# Altium PCB airu-board.PcbDoc
Units mil, origin at the board's own origin, x right, y up, seen from the top; angles counter-clockwise.
Board outline 3701 x 2363 mil, 4 copper layers (Top, Internal Plane 1, Internal Plane 2, Bottom), stack 64.6 mil thick; 113 components, 76 nets, 401 pads, 0 vias.
Unrouted connection lines stored in the file: 257.
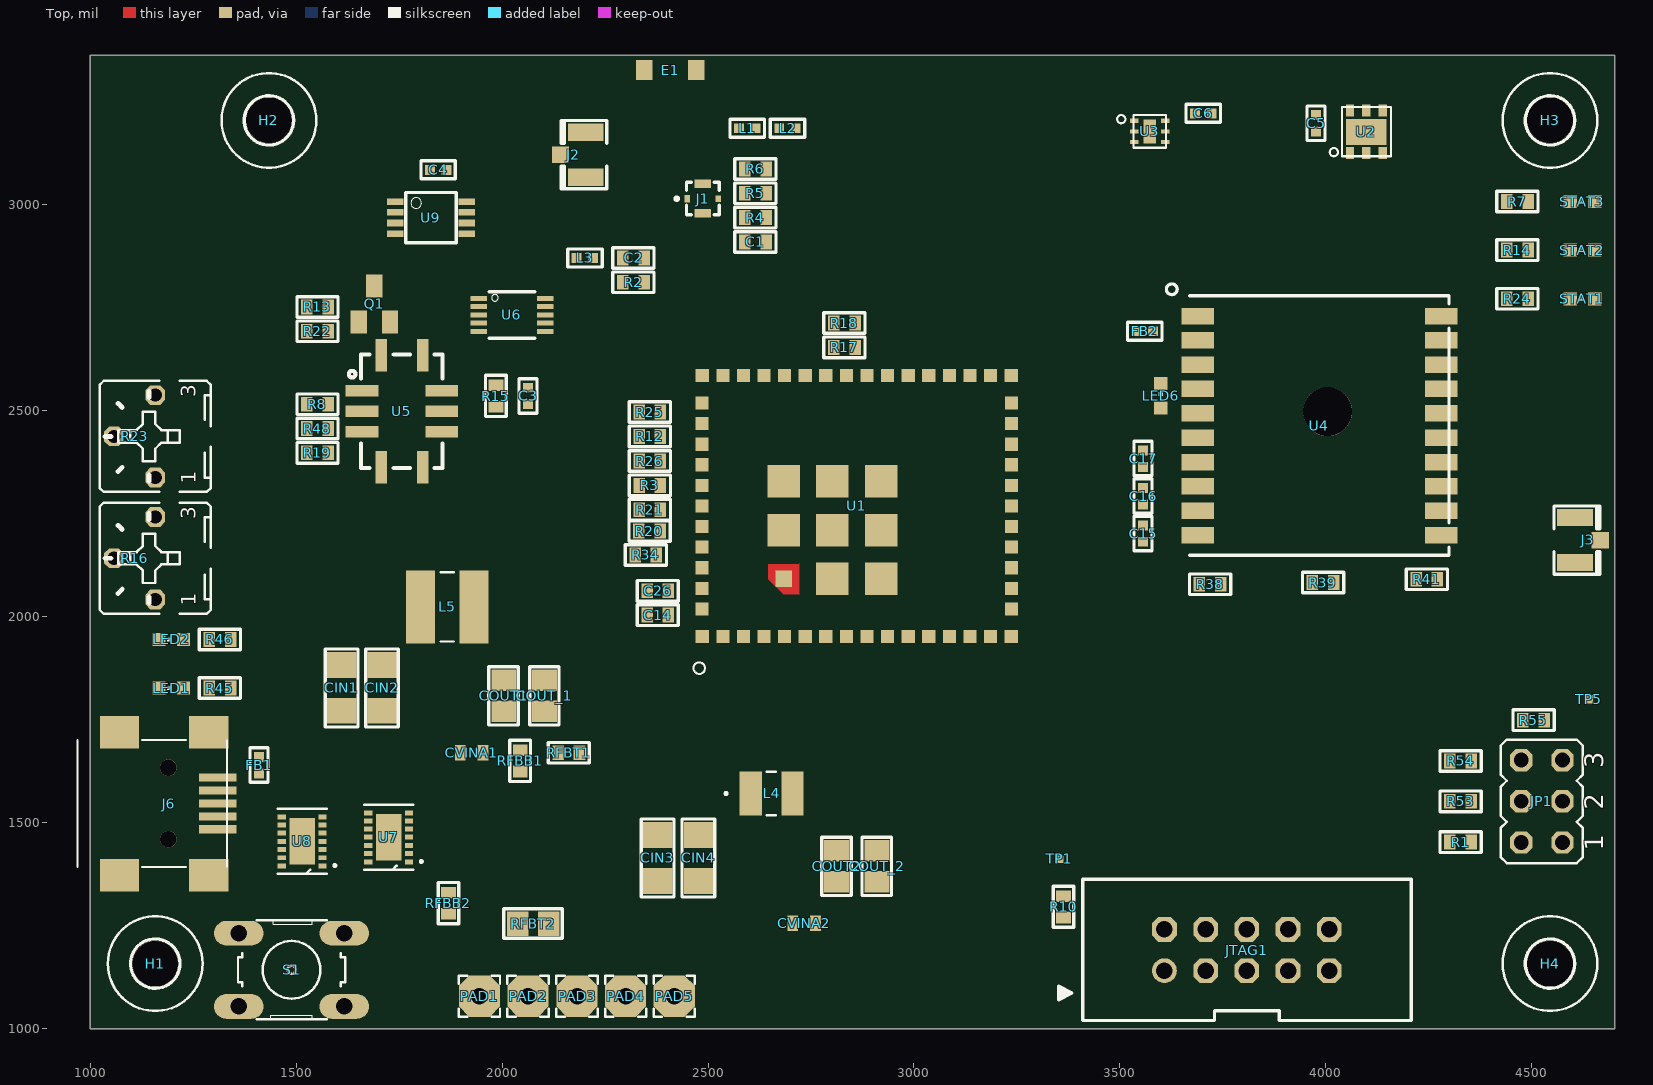
[diagram p0: Top view]
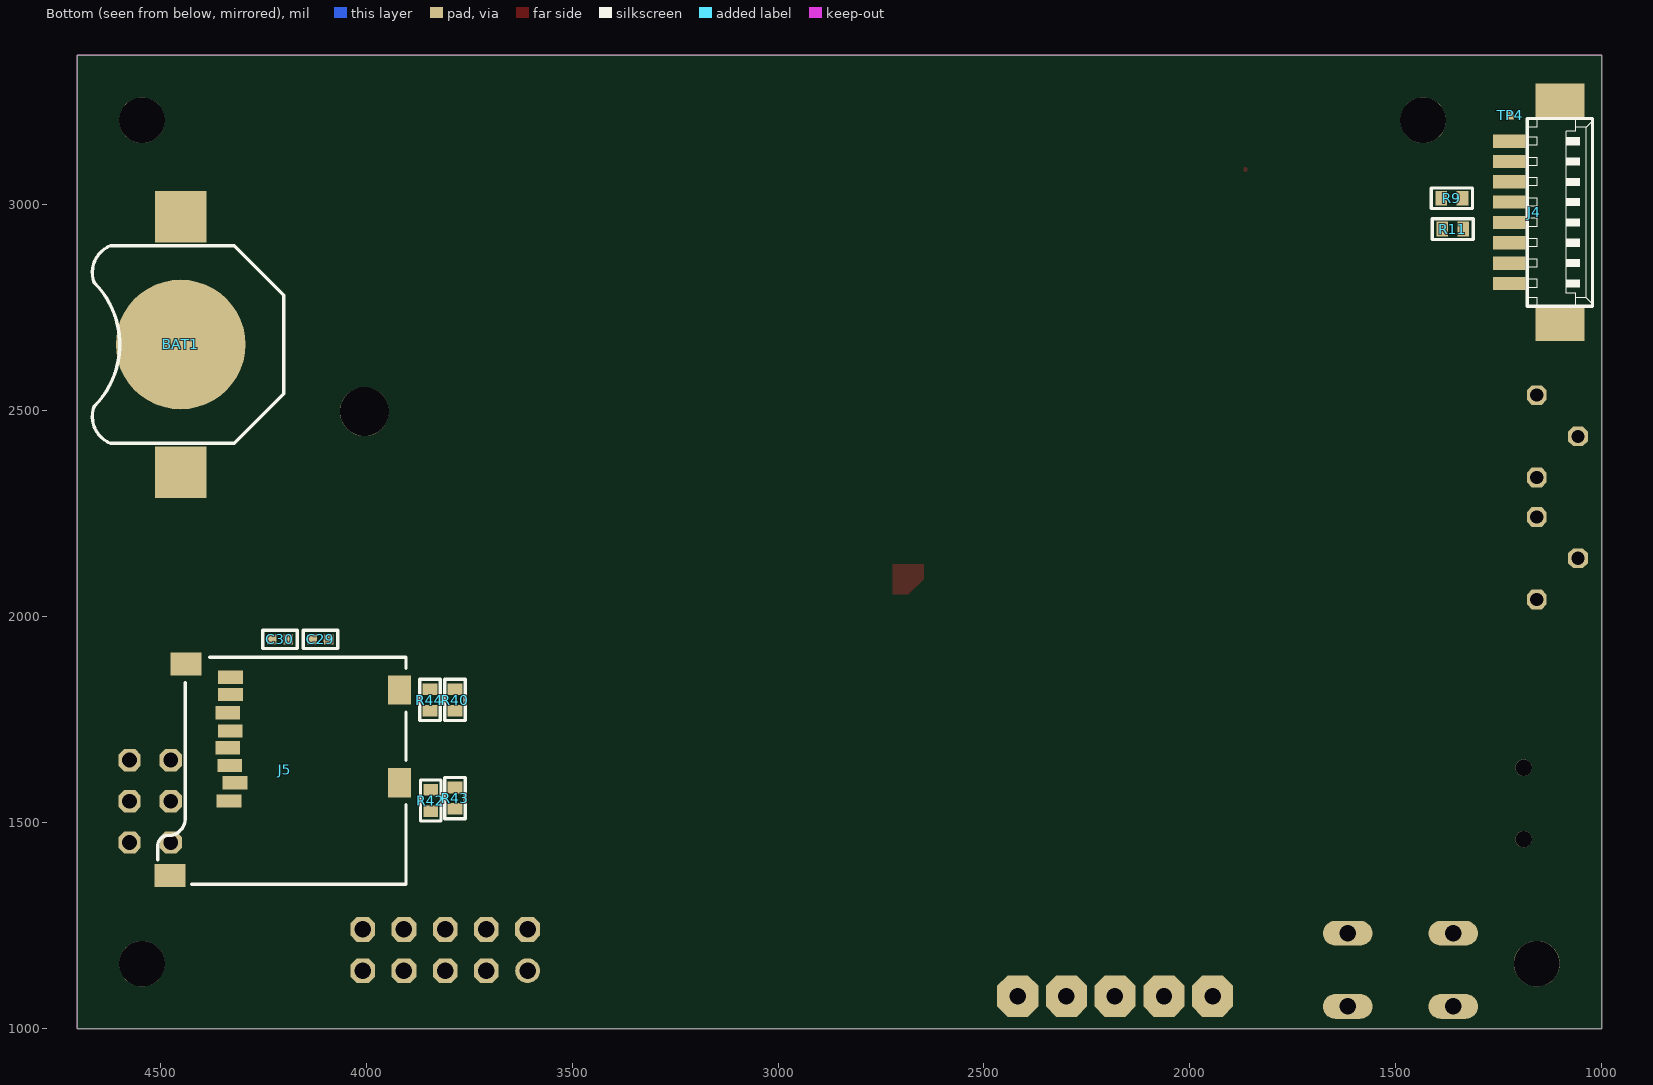
[diagram p1: Bottom view, seen from below]
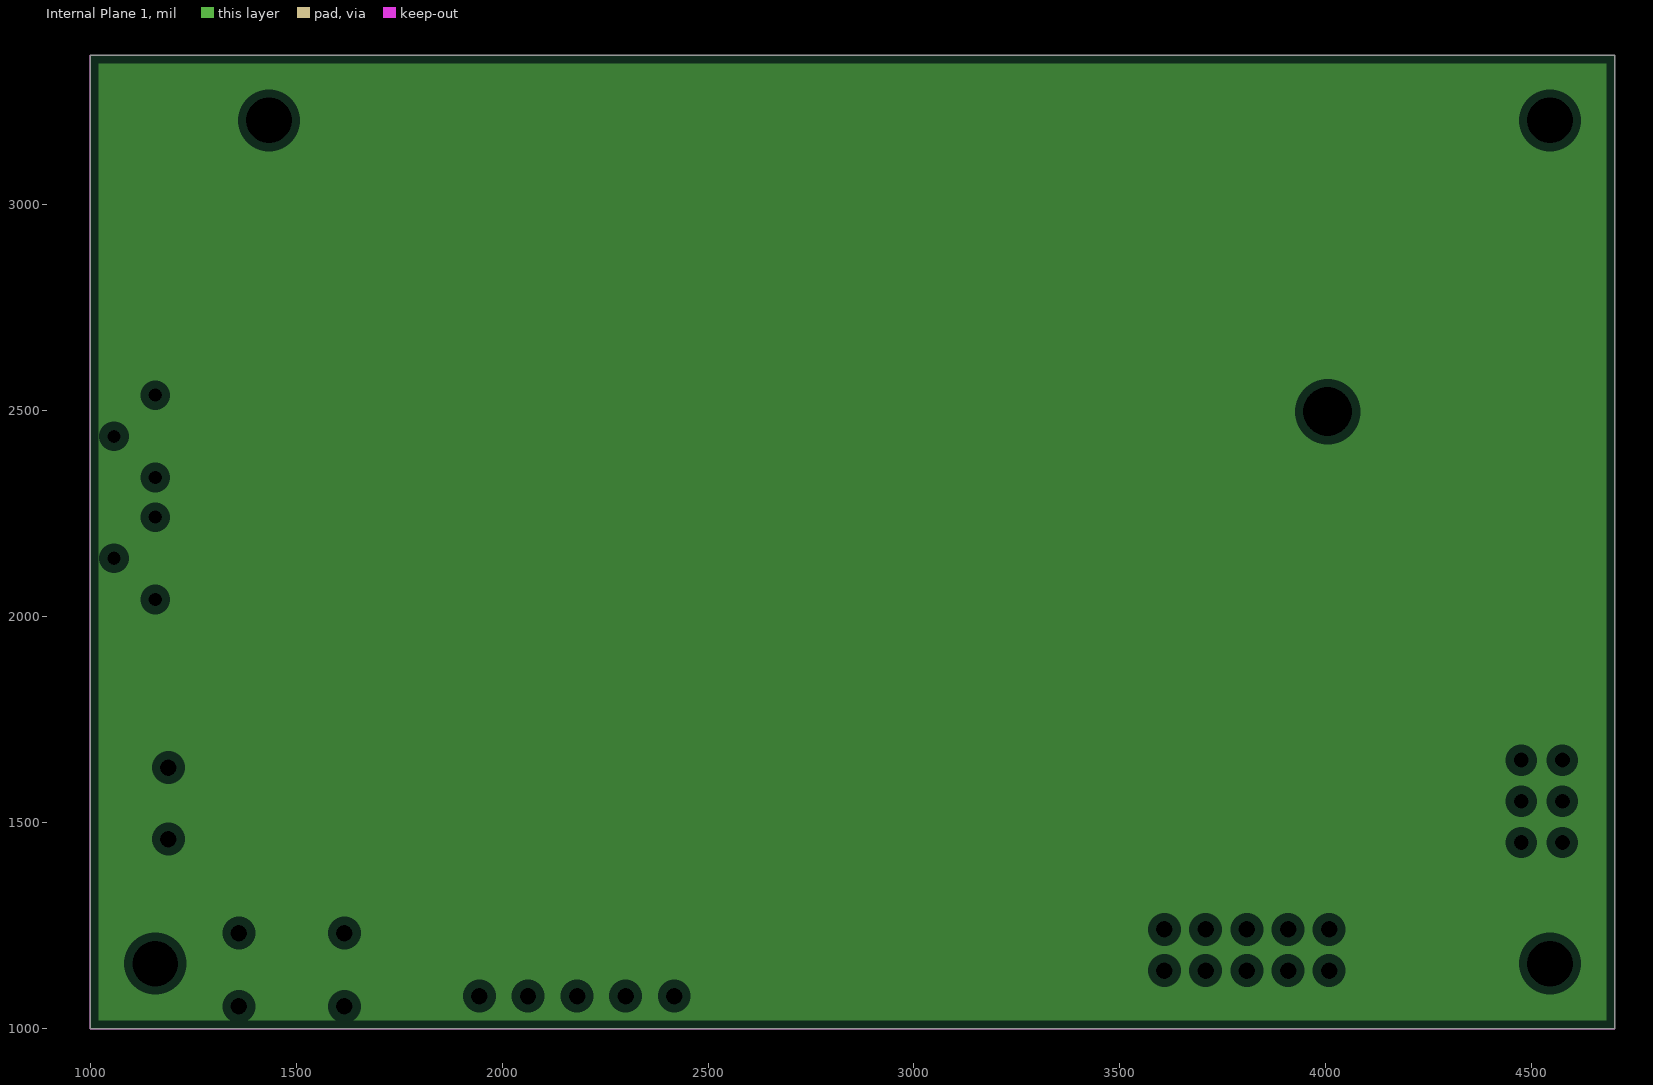
[diagram p2: Internal Plane 1, clearances drawn from the general rule]
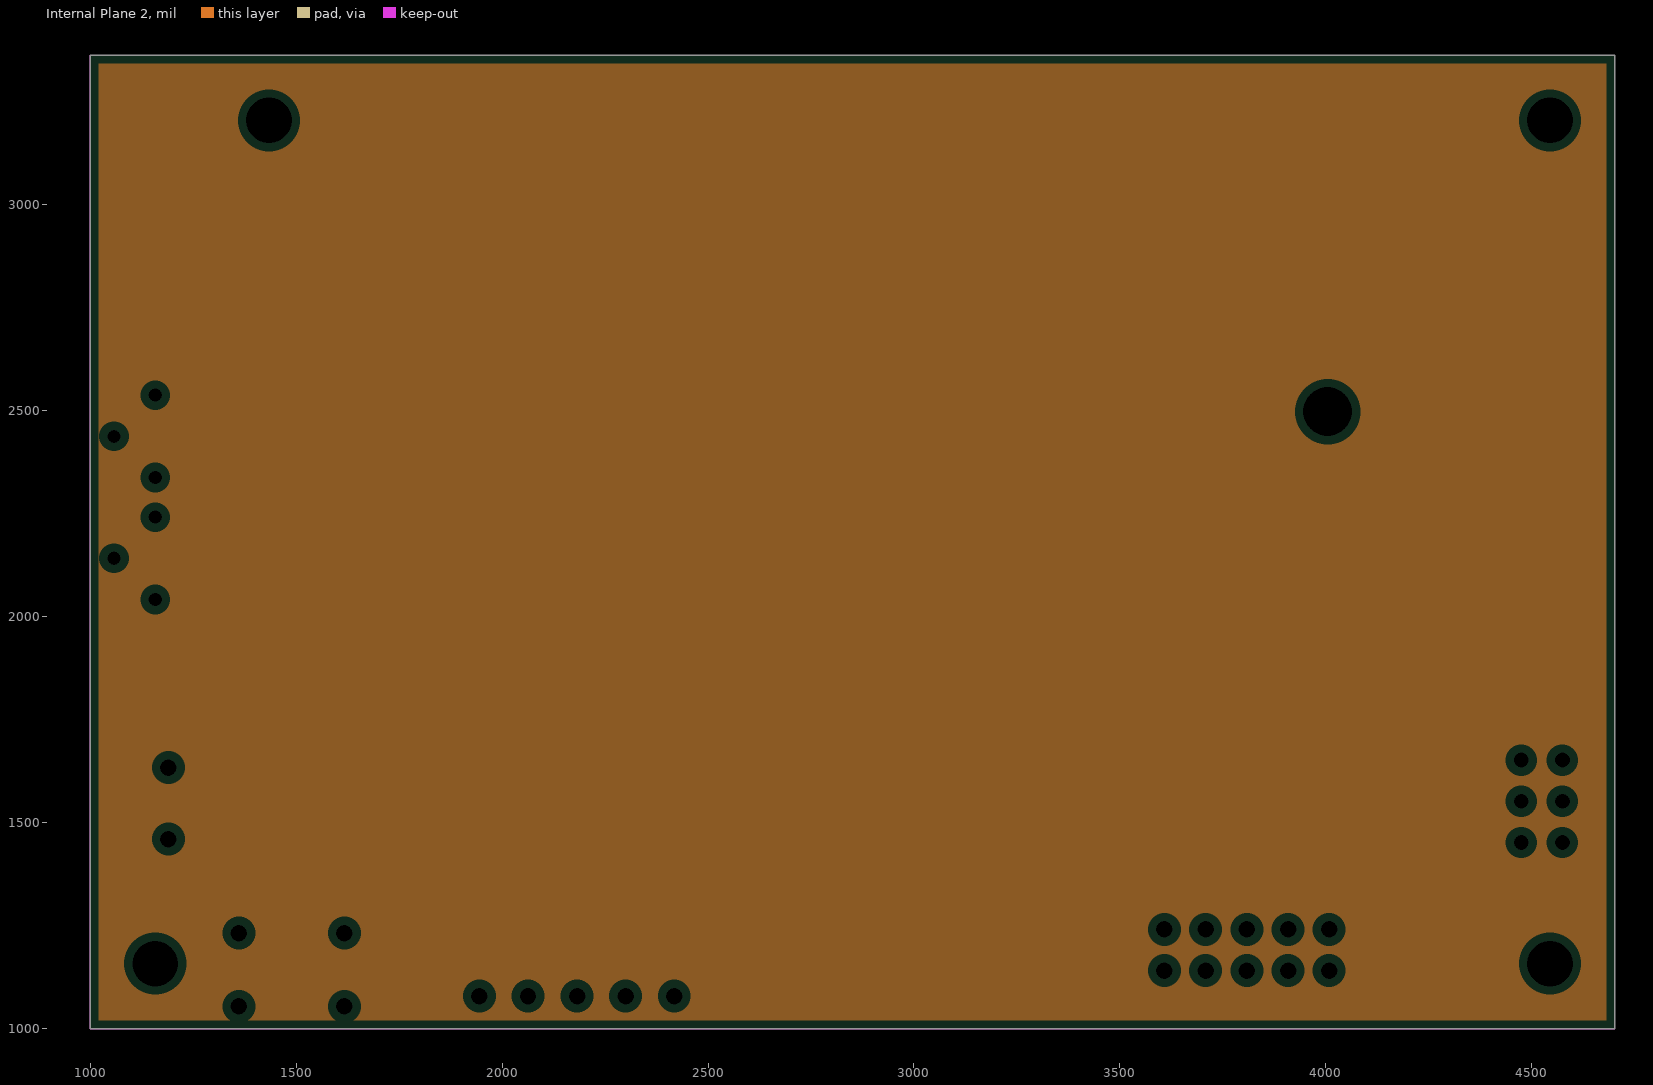
[diagram p3: Internal Plane 2, clearances drawn from the general rule]

## Layer stack, top to bottom
Top Solder: solder mask 1, Solder Resist, Dk 3.5
Top: signal copper 1.4
Dielectric 1: prepreg 6.7, FR-408, Dk 3.66
Internal Plane 1: plane copper 0.7
Dielectric 3: core 47, FR-408, Dk 3.66
Internal Plane 2: plane copper 0.7
Dielectric 2: prepreg 6.7, FR-408, Dk 3.66
Bottom: signal copper 1.4
Bottom Solder: solder mask 1, Solder Resist, Dk 3.5

## Board outline
1000,1000 4701,1000 4701,3363 1000,3363

## Design rules (kind name [scope] priority, off if disabled: settings)
Clearance mdViaVia [IsVia vs IsVia] p1: gap=8
Clearance mdPadVia [IsPad vs IsVia] p2: gap=8
Clearance mdPadPad [IsPad vs IsPad] p3: gap=8
Clearance mdWireVia [(InLayerClass('Signal Layers') AND IsTrack) vs IsVia] p4: gap=8
Clearance mdWirePad [(InLayerClass('Signal Layers') AND IsTrack) vs IsPad] p5: gap=8
Clearance mdWireWire [(InLayerClass('Signal Layers') AND IsTrack) vs (InLayerClass('Signal Layers') AND IsTrack)] p6: gap=8
Clearance [All] p7: gap=8
HoleSize [All] p1: absolutevalues=TRUE maxlimit=100000 minlimit=10 maxpercent=80.000 minpercent=20.000
HoleToHoleClearance [All] p1: gap=8 allowstackedmicrovias=TRUE
MinimumAnnularRing [All] p1: minimumring=4
PlaneClearance [All] p1: clearance=20
PlaneConnect [All] p1: planeconnectstyle=Relief reliefexpansion=20 reliefentries=4 reliefconductorwidth=10 reliefairgap=10
PolygonConnect ThermalVias [IsVia] p1: connectstyle=Direct reliefconductorwidth=10 reliefentries=4 polygonreliefangle="90 Angle" airgapwidth=10
PolygonConnect [All] p2: connectstyle=Relief reliefconductorwidth=10 reliefentries=4 polygonreliefangle="90 Angle" airgapwidth=10
RoutingVias [All] p1: holewidth=28 width=50 viastyle="Through Hole" minholewidth=28 minwidth=50 maxholewidth=28 maxwidth=50
SilkToSilkClearance [All] p1 off: silktosilkclearance=10
SilkToSolderMaskClearance [IsPad] p1 off: minsilkscreentomaskgap=10 clearancetoexposedcopper=TRUE
SolderMaskExpansion [All] p1: expansion=4
Width [All] p1: maxlimit=10 minlimit=10 preferedwidth=10
23 further rules are at their usual default settings.

## Components (designator, comment, footprint, x,y, rotation, side; value= is the part's Value field where it differs from the comment)
BAT1 "" BATTCON_12MM 4450,2661 r90 bottom
C1 "1.0pF" 0402#1 2615,2910 r0 top
C2 "10pF" 0402#1 2319,2871 r0 top
C3 "0.1uF" _0402 2063,2536 r270 top
C4 "0.1uF" _0402 1845,3085 r180 top
C5 "0.1uF" _0402 3976,3198 r90 top
C6 "0.1uF" _0402 3702,3222 r0 top
C14 "0.1uF" 0402#1 2378,2004 r180 top
C15 "1uF" _0402 3556,2202 r90 top
C16 "1uF" _0402 3556,2293 r90 top
C17 ".01u" _0402 3556,2384 r90 top
C26 "1uF" 0402#1 2378,2063 r180 top
C29 "1uF" _0402 4111,1945 r180 bottom
C30 "0.1uF" _0402 4209,1945 r180 bottom
CIN1 "22uF" 1206_190 1611,1827 r90 top
CIN2 "DNP" 1206_190 1709,1827 r90 top
CIN3 "22uF" 1206_190 2378,1414 r90 top
CIN4 "DNP" 1206_190 2477,1414 r90 top
COUT1 "22uF" 0805 2004,1808 r90 top
COUT2 "22uF" 0805 2812,1394 r90 top
COUT_1 "22uF" 0805 2103,1808 r90 top
COUT_2 "22uF" 0805 2910,1394 r90 top
CVINA1 "100nF" 0603 1926,1670 r0 top
CVINA2 "100nF" 0603 2733,1256 r0 top
E1 "" AH316M 2408,3327 r180 top
FB1 "60R" _0402 1410,1640 r90 top
FB2 "" _0402 3560,2693 r0 top
H1 "" 2,8 1158,1158 r0 top
H2 "" 2,8 1434,3205 r0 top
H3 "" 2,8 4544,3205 r0 top
H4 "" 2,8 4544,1158 r0 top
J1 "" MURATA_MM8030-2610RJ3 2487,3015 r0 top
J2 "" U.FL 2203,3122 r180 top
J3 "" U.FL 4605,2186 r0 top
J4 "" 53261-08 1127,2982 r270 bottom
J5 "" MICROSD_1:1 3903,1352 r90 bottom
J6 "" USB-MINIB 1150,1547 r270 top
JP1 "" JP3Q 4524,1552 r90 top
JTAG1 "" CORTEXM3_SWD10_MOLEX 3808,1191 r0 top
L1 "DNP" _0402 2595,3186 r0 top
L2 "3.6nH" _0402 2693,3186 r0 top
L3 "DNP" _0402 2201,2871 r0 top
L4 "1.0uH" SRN3015 2654,1571 r0 top
L5 "1.8uH" SDR0403 1867,2024 r0 top
LED1 "" CHIPLED_0603 1197,1827 r90 top
LED2 "" CHIPLED_0603 1197,1945 r90 top
LED6 "" CHIPLED_0603 3599,2536 r0 top
PAD1 "" 2,54/1,0 1945,1079 r0 top
PAD2 "" 2,54/1,0 2063,1079 r0 top
PAD3 "" 2,54/1,0 2182,1079 r0 top
PAD4 "" 2,54/1,0 2300,1079 r0 top
PAD5 "" 2,54/1,0 2418,1079 r0 top
Q1 "" SOT23 1690,2759 r0 top
R1 "2.7k" 0402#1 4327,1453 r180 top
R2 "DNP" 0402#1 2319,2812 r0 top
R3 "100k" 0402#1 2359,2319 r180 top
R4 "0" 0402#1 2615,2969 r0 top
R5 "DNP" 0402#1 2615,3028 r0 top
R6 "DNP" 0402#1 2615,3087 r0 top
R7 "330" 0402#1 4465,3008 r180 top
R8 "820" 0402#1 1552,2516 r180 top
R9 "10k" 0402#1 1364,3016 r0 bottom
R10 "0" 0402#1 3363,1296 r270 top
R11 "33" 0402#1 1362,2941 r0 bottom
R12 "33" 0402#1 2359,2438 r180 top
R13 "82" 0402#1 1552,2752 r180 top
R14 "330" 0402#1 4465,2890 r180 top
R15 "10k" 0402#1 1985,2536 r270 top
R16 "" B25P 1158,2142 r90 top
R17 "2.7k" 0402#1 2831,2654 r0 top
R18 "2.7k" 0402#1 2831,2713 r0 top
R19 "51" 0402#1 1552,2398 r180 top
R20 "DNP" 0402#1 2358,2208 r180 top
R21 "DNP" 0402#1 2359,2260 r180 top
R22 "82" 0402#1 1552,2693 r180 top
R23 "" B25P 1158,2438 r90 top
R24 "330" 0402#1 4465,2772 r180 top
R25 "DNP" 0402#1 2359,2497 r180 top
R26 "33" 0402#1 2359,2378 r180 top
R34 "10k" 0402#1 2349,2150 r180 top
R38 "33" 0402#1 3719,2079 r180 top
R39 "330" 0402#1 3993,2083 r180 top
R40 "10k" 0402#1 3784,1798 r270 bottom
R41 "10k" 0402#1 4245,2091 r180 top
R42 "DNP" 0402#1 3843,1554 r270 bottom
R43 "DNP" 0402#1 3784,1560 r270 bottom
R44 "10k" 0402#1 3845,1798 r270 bottom
R45 "330" 0402#2 1315,1827 r0 top
R46 "330" 0402#2 1315,1945 r0 top
R48 "820" 0402#1 1552,2457 r180 top
R53 "100k" 0402#1 4327,1552 r180 top
R54 "100k" 0402#1 4327,1650 r180 top
R55 "270" 0402#1 4504,1749 r180 top
RFBB1 "137k" 0402#2 2044,1650 r90 top
RFBB2 "140k" 0402#2 1870,1305 r270 top
RFBT1 "768k" 0402#2 2162,1670 r0 top
RFBT2 "1.26M" 0805 2075,1255 r0 top
S1 "" B3F-10XX 1489,1143 r180 top
STAT1 "" CHIPLED_0603 4623,2772 r90 top
STAT2 "" CHIPLED_0603 4623,2890 r90 top
STAT3 "" CHIPLED_0603 4623,3008 r90 top
TP1 "" PAD.02X.02 3353,1412 r0 top
TP4 "" PAD.02X.02 1223,3217 r180 bottom
TP5 "" PAD.02X.02 4638,1800 r0 top
U1 "" CC3200MOD 2961,2269 r0 top
U2 "" WSON 4098,3177 r0 top
U3 "" USON 3572,3178 r0 top
U4 "" FGPMMOPA6H 3984,2464 r0 top
U5 "" MICS_10-SMD 1757,2499 r90 top
U6 "" S-PDSO-G10 2024,2733 r270 top
U7 "" R-PVSON-N14 1725,1465 r180 top
U8 "" R-PVSON-N14 1515,1455 r180 top
U9 "" DGK_S-PDSO-G8 1827,2969 r270 top

## Footprints (in the part's own frame and the unit in brackets; to place one, negate y for a bottom-side part, rotate by r counter-clockwise, add the part's x,y. Pads: shape width x height; smd on the part's side, far side on the other; paste and mask are expansions set on the pad)
2,8 [mil] "2,8"
  round 111 hole 111: 1(0,0)
  silkscreen extent -115,-115 115,115
2,54/1,0 [mil] "2,54/1,0"
  oct 100x100 hole 40: 1(0,0)
  silkscreen extent -50,-50 50,50
0402#1 [mil] "0402"
  rect 28x36 smd: 1(-25.59,0) 2(26,0)
  silkscreen extent -50,-25 50,25
0402#2 [mil] "0402"
  rect 28x36 smd: P1(-25.59,0) P2(26,0)
  silkscreen extent -50,-25 50,25
0603 [mil] "0603"
  rect 26x38 smd: 1(-27.5,0) 2(28,0)
0805 [mil] "0805"
  rect 52x60 smd: 1(-37.4,0) 2(38,0)
  silkscreen extent -71,-35 71,36
1206_190 [mil] "1206_190"
  rect 63x71 smd: 1(-55.12,0) 2(56,0)
  silkscreen extent -94,-39 95,40
53261-08 [mil] "53261-08"
  rect 32x79 smd: 1(173,-98.43) 2(124,-98.43) 3(74,-98.43) 4(25,-98.43) 5(-24.61,-98.43) 6(-73.82,-98.43) 7(-123.03,-98.43) 8(-172.24,-98.43)
  rect 83x119 smd: S1(271,25) S2(-270.67,25)
  silkscreen extent -227,-54 228,104
_0402 [mil] "_0402"
  rect 24x24 smd: 1(-20,0) 2(20,0)
  silkscreen extent -42,-22 42,22
AH316M [mil] "AH316M"
  rect 40x48 smd: P$1(-62.99,0) P$2(63,0)
B3F-10XX [mil] "B3F-10XX"
  oval 120x60 hole 40: 1(-128,89) 2(128,89) 3(-128,-89) 4(128,-89)
  silkscreen extent -130,-120 130,120
B25P [mil] "B25P"
  oct 48x48 hole 32: A(-100,0) E(100,0) S(0,100)
  silkscreen extent -135,-135 135,135
BATTCON_12MM [mil] "BATTCON_12MM"
  rrect100% 315x315 smd: GND(0,0)
  rect 125x125 smd: PWR@1(-310,0) PWR@2(310,0)
  silkscreen extent -240,-250 240,215
CC3200MOD [mil] "CC3200MOD"
  rect 32x32 smd: P1(-475,-316.93) P2(-425,-316.93) P3(-375,-316.93) P4(-325,-316.93) P5(-275,-316.93) P6(-225,-316.93) P7(-175,-316.93) P8(-125,-316.93) P9(-75,-316.93) P10(-25,-316.93) P11(25,-316.93) P12(75,-316.93) P13(125,-316.93) P14(175,-316.93) P15(225,-316.93) P16(275,-316.93) P17(276,-250) P18(276,-200) P19(276,-150) P20(276,-100) P21(276,-50) P22(276,0) P23(276,50) P24(276,100) P25(276,150) P26(276,200) P27(276,250) P28(275,317) P29(225,317) P30(175,317) P31(125,317) P32(75,317) P33(25,317) P34(-25,317) P35(-75,317) P36(-125,317) P37(-175,317) P38(-225,317) P39(-275,317) P40(-325,317) P41(-375,317) P42(-425,317) P43(-475,317) P44(-475.98,250) P45(-475.98,200) P46(-475.98,150) P47(-475.98,100) P48(-475.98,50) P49(-475.98,0) P50(-475.98,-50) P51(-475.98,-100) P52(-475.98,-150) P53(-475.98,-200) P54(-475.98,-250)
  rect 40x40 smd: P55(-277.17,-177.17)
  rect 79x79 smd: P56(-159.06,-177.17) P57(-40.94,-177.17) P58(-277.17,-59.06) P59(-159.06,-59.06) P60(-40.94,-59.06) P61(-277.17,60) P62(-159.06,60) P63(-40.94,60)
  Top region: -239.5,-140.5 -239.5,-214.5 -277.5,-214.5 -314.5,-177.5 -315,-142 -239.5,-141.5
  silkscreen extent -496,-408 -468,-380
CHIPLED_0603 [mil] "CHIPLED_0603"
  rect 32x32 smd: A(0,-29.53) C(0,30)
  silkscreen extent -5,0 5,10
CORTEXM3_SWD10_MOLEX [mil] "CORTEXM3_SWD10_MOLEX"
  round 60 hole 40: 1(-200,-50)
  oct 60x60 hole 40: 2(-200,50) 3(-100,-50) 4(-100,50) 5(0,-50) 6(0,50) 7(100,-50) 8(100,50) 9(200,-50) 10(200,50)
  silkscreen extent -457,-171 399,172
DGK_S-PDSO-G8 [mil] "DGK_S-PDSO-G8"
  rect 16x40 smd: 1(-38.39,-86.61) 2(-12.8,-86.61) 3(13,-86.61) 4(39,-86.61) 5(39,87) 6(13,87) 7(-12.8,87) 8(-38.39,87)
  silkscreen extent -61,-61 61,62
FGPMMOPA6H [mil] "FGPMMOPA6H"
  round 119 hole 119: 1(20,34)
  rect 79x40 smd: P$1(-295.28,266) P$2(-295.28,207) P$3(-295.28,148) P$4(-295.28,89) P$5(-295.28,30) P$6(-295.28,-29.53) P$7(-295.28,-88.58) P$8(-295.28,-147.64) P$9(-295.28,-206.69) P$10(-295.28,-265.75) P$11(296,-265.75) P$12(296,-206.69) P$13(296,-147.64) P$14(296,-88.58) P$15(296,-29.53) P$16(296,30) P$17(296,89) P$18(296,148) P$19(296,207) P$20(296,266)
  silkscreen extent -371,-315 315,344
JP3Q [mil] "JP3Q"
  oct 54x54 hole 36: 1(-100,-50) 2(-100,50) 3(0,-50) 4(0,50) 5(100,-50) 6(100,50)
  silkscreen extent -150,-100 150,100
MICROSD_1:1 [mil] "MICROSD_1:1"
  rect 32x60 smd: 1(201,430) 2(245,415) 3(287,428) 4(330,433) 5(371,427) 6(415,433) 7(459,426) 8(501,426)
  rect 71x56 smd: CD1(470,16) CD2(245,16)
  rect 56x75 smd: GND1(20,573) GND3(533,534)
  silkscreen extent -1,0 550,603
MICS_10-SMD [mil] "MICS_10-SMD"
  rect 28x79 smd: A(50,97) B(0,97) C(-50,97) F(-50,-96.46) G(0,-96.46) H(50,-96.46)
  rect 79x28 smd: D(-135.83,50) E(-135.83,-50) J(136,-50) K(136,50)
  silkscreen extent -138,-98 138,129
MURATA_MM8030-2610RJ3 [mil] "MURATA_MM8030-2610RJ3"
  rect 14x18 smd: 1(-37.4,0)
  rect 14x16 smd: 2(38,0)
  rect 40x20 smd: 3(0,36) 4(0,-35.43)
  silkscreen extent -67,-39 40,40
PAD.02X.02 [mil] "PAD.02X.02"
  rect 20x20 smd: P$1(0,0)
R-PVSON-N14 [mil] "R-PVSON-N14"
  rect 20x12 smd: 1(-49.21,60) 2(-49.21,40) 3(-49.21,20) 4(-49.21,0) 5(-49.21,-19.68) 6(-49.21,-39.37) 7(-49.21,-59.06) 8(50,-59.06) 9(50,-39.37) 10(50,-19.68) 11(50,0) 12(50,20) 13(50,40) 14(50,60)
  rect 63x113 smd: 15(0,0)
  silkscreen extent -82,-79 59,79
S-PDSO-G10 [mil] "S-PDSO-G10"
  rect 12x40 smd: 1(-39.37,-80.71) 2(-19.68,-80.71) 3(0,-80.71) 4(20,-80.71) 5(40,-80.71) 6(40,81) 7(20,81) 8(0,81) 9(-19.68,81) 10(-39.37,81)
  silkscreen extent -56,-55 57,56
SDR0403 [mil] "SDR0403"
  rect 71x177 smd: 1(-65,0) 2(65,0)
  silkscreen extent -16,-84 16,84
SOT23 [mil] "SOT23"
  rect 40x56 smd: 1(-37.4,-43.31) 2(38,-43.31) 3(0,44)
SRN3015 [mil] "SRN3015"
  rect 54x107 smd: 1(-50.31,0) 2(51,0)
  silkscreen extent -113,-53 11,53
U.FL [mil] "U.FL"
  rect 87x42 smd: 1(0,55) 2(0,-54.13)
  rect 42x40 smd: 3(61,0)
  silkscreen extent -51,-83 60,83
USB-MINIB [mil] "USB-MINIB"
  round 40 hole 40: 1(-86.61,40) 1(87,40)
  rect 20x91 smd: D+(0,160) D-(-31.5,160) GND(63,160) ID(32,160) VBUS(-62.99,160)
  rect 79x95 smd: GND1(-173.23,-78.74) GND2(-173.23,138) GND3(174,138) GND4(174,-78.74)
  silkscreen extent -154,-181 154,182
USON [mil] "USON"
  rect 20x10 smd: P1(-37.4,26) P2(-37.4,0) P3(-37.4,-25.59) P4(38,-25.59) P5(38,0) P6(38,26)
  rect 30x58 smd: P7(0,0)
  silkscreen extent -79,-39 40,40
WSON [mil] "WSON"
  rect 20x30 smd: P1(-39.37,-51.18) P2(0,-51.18) P3(40,-51.18) P4(40,52) P5(0,52) P6(-39.37,52)
  rect 99x63 smd: P7(0,0)
  silkscreen extent -89,-59 60,60

## Part data
BAT1: library part BATTCON_12MM
C1 C2 C14 C26 R1 R2 R3 R4 R5 R6 R7 R8 R9 R10 R11 R12 R13 R14 R15 R17 R18 R19 R20 R21 R22 R24 R25 R26 R34 R38 R39 R40 R41 R42 R43 R44 R45 R46 R48 R53 R54 R55 RFBB1 RFBB2 RFBT1: library part 0402
C3 C4 C5 C6 C15 C16 C17 C29 C30 FB1 FB2 L1 L2 L3: library part _0402
CIN1 CIN2 CIN3 CIN4: library part 1206_190
COUT1 COUT2 COUT_1 COUT_2 RFBT2: library part 0805
CVINA1 CVINA2: library part 0603
E1: library part AH316M
H1 H2 H3 H4: library part 2,8
J1: library part MURATA_MM8030-2610RJ3
J2 J3: library part U.FL
J4: library part 53261-08
J5: library part MICROSD_1:1
J6: library part USB-MINIB
JP1: library part JP3Q
JTAG1: library part CORTEXM3_SWD10_MOLEX
L4: library part SRN3015
L5: library part SDR0403
LED1 LED2 LED6 STAT1 STAT2 STAT3: library part CHIPLED_0603
PAD1 PAD2 PAD3 PAD4 PAD5: library part 2,54/1,0
Q1: library part SOT23
R16 R23: library part B25P
S1: library part B3F-10XX
TP1 TP4 TP5: library part PAD.02X.02
U1: library part CC3200MOD
U2: library part WSON
U3: library part USON
U4: library part FGPMMOPA6H
U5: library part MICS_10-SMD
U6: library part S-PDSO-G10
U7 U8: library part R-PVSON-N14
U9: library part DGK_S-PDSO-G8

## Nets (pads, with @x,y where several pads share a name; then routed paths per layer and width w, separated by ;. In a path a pad name is that pad's centre, name@x,y a point inside that pad or via, vN(x,y) a via of type N, cw(c..) or ccw(c..) an arc to the next point about the centre after c; other vN are vias at no path point)
ADC_CONV_RDY: R15.1 U1.P49 U6.2
CC_I2C_SCL: R18.1 U1.P5 U2.P6 U3.P4 U6.10
CC_I2C_SDA: R17.1 U1.P4 U2.P1 U3.P6 U6.9
CC_JTAG_TCK: JTAG1.4 R3.2 U1.P21
CC_JTAG_TDI: JTAG1.8 R20.1 U1.P12
CC_JTAG_TDO: JTAG1.6 U1.P18
CC_JTAG_TMS: JTAG1.2 R21.1 U1.P22
CC_NRESET: JTAG1.10 R25.2 R34.1 R45.P1 S1.1 S1.2 U1.P35 U8.14
CC_RF_BG: R2.2 R4.1 U1.P31
CC_SDCARD_CLK: J5.5 R44.2 U1.P7
CC_SDCARD_CMD: J5.3 R43.1 U1.P8
CC_SDCARD_DATA0: J5.7 R42.1 U1.P6
CC_SOP0: JP1.6 R54.2 U1.P34
CC_SOP1: JP1.4 R53.2 U1.P24
CC_TCX0_END/SOP2: JP1.2 R1.2 U1.P23
CC_UART0_RX: R38.1 U1.P10
CC_UART0_TX: R12.2 U4.P$10
CC_UART1_RX: R11.1 U1.P47
CC_UART1_TX: J4.5 R26.2
GND: BAT1.GND C1.2 C3.2 C4.2 C5.2 C6.2 C14.2 C15.2 C16.2 C17.2 C26.2 C29.2 C30.2 CIN1.2 CIN2.2 CIN3.2 CIN4.2 COUT1.2 COUT2.2 COUT_1.2 COUT_2.2 CVINA1.2 CVINA2.2 E1.P$2 J1.3 J1.4 J2.1 J2.2 J3.1 J3.2 J4.7 J5.6 J5.GND1 J5.GND3 J6.GND JTAG1.3 JTAG1.5 JTAG1.9 L1.1 L3.1 LED1.C Q1.2 R1.1 R3.1 R16.A R16.S R19.1 R22.1 R23.A R23.S R25.1 R39.1 R40.1 R41.1 R44.1 R53.1 R54.1 RFBB1.P2 RFBB2.P2 S1.3 S1.4 STAT1.C STAT2.C STAT3.C TP5.P$1 U1.P1 U1.P2 U1.P16 U1.P27 U1.P28 U1.P30 U1.P32 U1.P38 U1.P43 U1.P55 U1.P56 U1.P57 U1.P58 U1.P59 U1.P60 U1.P61 U1.P62 U1.P63 U2.P2 U2.P7 U3.P2 U3.P3 U3.P7 U4.P$3 U4.P$8 U4.P$12 U4.P$19 U6.1 U6.3 U7.15 U8.15 U9.4
GPS_NRESET: R41.2 U1.P3 U4.P$2
MICS_PREHEAT_NOX: Q1.1 U1.P11
N$1: J1.1 R4.2 R5.1
N$2: R5.2 R6.2
N$3: J1.2 L1.2 L2.1 R6.1
N$4: C1.1 E1.P$1 L2.2
N$5: CVINA1.1 U8.12
N$6: L5.2
N$7: C2.1 R2.1
N$8: C2.2 J2.3 L3.2
N$9: L5.1 U8.6
N$10: L4.1 U7.6
N$11: J4.4 R11.2
N$12: L4.2
N$13: R13.2 U5.A
N$14: Q1.3 R13.1 R19.2
N$15: JTAG1.1 R10.1 TP1.P$1
N$16: RFBB1.P1 RFBT1.P2
N$17: RFBB2.P1 RFBT2.2
N$18: CVINA2.1 U7.12
N$19: R22.2 U5.C
N$20: R12.1 U1.P9
N$21: R16.E R48.1
N$22: R26.1 U1.P46
N$23: LED2.A R46.P2
N$24: R8.1 R23.E
N$25: LED1.A R45.P2
N$26: R24.1 STAT1.A
N$27: R14.1 STAT2.A
N$28: R7.1 STAT3.A
N$29: PAD1.1 U1.P48
N$30: J3.3 U4.P$11
N$31: LED6.A U4.P$5
N$32: LED6.C R39.2
N$33: PAD2.1 U1.P19
N$34: PAD3.1 U1.P42
N$35: PAD4.1 U1.P25
N$36: PAD5.1 U1.P26
N$39: FB1.1 J6.VBUS
N$44: R38.2 U4.P$9
N$48: JP1.1 JP1.3 JP1.5 R55.1
PG_5V: R46.P1 U7.14
PM_RST: J4.3 R9.1 U1.P53
PM_SET: J4.6 U1.P54
SDCARD_CD: J5.CD1 R40.2 U1.P44
STAT_LED1: R24.2 U1.P50
STAT_LED2: R14.2 U1.P51
STAT_LED3: R7.2 U1.P52
V_3V3: C5.1 C6.1 C14.1 C16.1 C17.1 C26.1 C29.1 C30.1 COUT1.1 COUT_1.1 FB2.1 FB2.2 J5.4 J5.CD2 R9.2 R10.2 R15.2 R17.2 R18.2 R20.2 R21.2 R34.2 R42.2 R43.2 R55.2 RFBT1.P1 U1.P36 U1.P37 U1.P40 U2.P5 U3.P1 U4.P$1 U8.4
V_5V: C3.1 C4.1 COUT2.1 COUT_2.1 J4.8 RFBT2.1 TP4.P$1 U5.F U5.G U5.H U5.J U6.8 U7.4 U9.8 | length 2.4
  Top w10: C4.1 C4.1@1865,3087.38
VBAT_3V3: BAT1.PWR@1 C15.1 U4.P$4
VBUS_USB: CIN1.1 CIN2.1 CIN3.1 CIN4.1 FB1.2 U7.10 U8.10
VOX_RAWA: R48.2 U5.B U9.3
VOX_RAWB: U6.4 U9.1 U9.2
VRED_RAWA: R8.2 U5.D U9.5
VRED_RAWB: U6.5 U9.6 U9.7
pads on no net: BAT1.PWR@2 H1.1 H2.1 H3.1 H4.1 J4.1 J4.2 J4.S1 J4.S2 J5.1 J5.2 J5.8 J6.1 J6.D+ J6.D- J6.GND1 J6.GND2 J6.GND3 J6.GND4 J6.ID JTAG1.7 LED2.C U1.P13 U1.P14 U1.P15 U1.P17 U1.P20 U1.P29 U1.P33 U1.P39 U1.P41 U1.P45 U2.P3 U2.P4 U3.P5 U4.1 U4.P$6 U4.P$7 U4.P$13 U4.P$14 U4.P$15 U4.P$16 U4.P$17 U4.P$18 U4.P$20 U5.E U5.K U6.6 U6.7 U7.1 U7.2 U7.3 U7.5 U7.7 U7.8 U7.9 U7.11 U7.13 U8.1 U8.2 U8.3 U8.5 U8.7 U8.8 U8.9 U8.11 U8.13

## Polygon pours and split planes (outlines as drawn)
no net on Internal Plane 1 (split plane): 4680.9,1020.1 1020.1,1020.1 1020.1,3342.9 4680.9,3342.9
no net on Internal Plane 2 (split plane): 4680.9,1020.1 1020.1,1020.1 1020.1,3342.9 4680.9,3342.9

## Keep-outs
Keep-Out Layer:
  the board outline again, w0

## Silkscreen, mask and mechanical layers (free items; w line width, h text height)
Dimension:
  the board outline again, w0
Unrouted:
  drawing of 257 lines, arcs and shapes, not listed

## Text inside footprints (layer, text, board x,y; h text height)
J4: bDocu "1" at 1136.84,2735 h117.8 r90
JP1: Top Overlay "3" at 4689,1632 h77.5 r90; Top Overlay "2" at 4689,1532 h77.5 r90; Top Overlay "1" at 4689,1432 h77.5 r90
JTAG1: tDocu "1" at 3522.57,1112.26 h77.5
R16: Top Overlay "1" at 1268,2027 h60.45 r90; Top Overlay "3" at 1268,2237 h60.45 r90
R23: Top Overlay "1" at 1268,2323 h60.45 r90; Top Overlay "3" at 1268,2533 h60.45 r90
S1: tDocu "4" at 1349,1253 h77.5 r180; tDocu "3" at 1669,1253 h77.5 r180; tDocu "2" at 1349,1083 h77.5 r180; tDocu "1" at 1659,1078 h77.5 r180